# EAGLE board picfancontrol (EAGLE 9.5.2)

Size 100 x 80 mm. Coordinates in mm from the lower left corner, seen from the top.
Outline: 0,0 100,0 100,80 0,80 0,0
Copper layers 16: Bottom 0.035mm
Design rules "default": minimum track width 6mil, minimum drill 0.35mm, track to track 6mil, track to pad 6mil, pad to pad 6mil, via to via 6mil, smd to smd 6mil, copper to edge 40mil, drill to drill 6mil, minimum pad ring 10mil, minimum via ring 8mil, stop-mask expansion 4mil, vias tented up to drill 0mil, thermal gap 10mil

## Footprints (pad centres in the part's own frame; a part is rotated, then mirrored left to right if it is on the bottom)
1X02 = drill 1.016 long: 1 -1.27,0; 2 1.27,0
C2.5-2 = drill 0.813 pad 1.6 octagon: 1 -1.27,0; 2 1.27,0
DIL8 = drill 0.813 long: 1 -3.81,-3.81; 2 -1.27,-3.81; 3 1.27,-3.81; 4 3.81,-3.81; 5 3.81,3.81; 6 1.27,3.81; 7 -1.27,3.81; 8 -3.81,3.81
TO92 = drill 0.813 octagon: 1 -1.27,0; 2 0,1.905; 3 1.27,0
DPAK_TO252 = smd 3 x 1.6: 1 -4.2,2.28; 3 -4.2,-2.28 | smd 6 x 6.7: 2 2.5,0
RS-2,5 = drill 0.813 pad 1.6 octagon: 1 -1.27,0; 2 1.27,0

## Placement (x,y rotation side)
12V  [1X02]  5.08,77.47 0 top
C1  [C2.5-2]  63.5,67.31 0 top
FAN  [1X02]  3.81,60.96 270 top
IC1  PIC12F675P  [DIL8]  31.75,63.5 270 top
IC2  7805L  [TO92]  13.97,63.5 270 top
T1  [DPAK_TO252]  7.62,53.34 0 bottom
TR1  [RS-2,5]  52.07,40.64 0 top
TR2  [RS-2,5]  55.88,54.61 0 top

## Library data of the parts
12V FAN = pinhead
C1 = capacitor-wima
IC1 = microchip; MF: MICROCHIP; MPN: PIC12F675-E/P; OC_FARNELL: 9759018; OC_NEWARK: 92C4340
IC2 = linear
T1 = we-transistor
TR1 TR2 = discrete

## Nets
GND: 12V.2 C1.2 IC1.8 IC2.2 T1.3
N$1: C1.1 IC1.1 IC2.1 TR1.1 TR2.1
N$2: IC1.2
N$3: FAN.2 T1.2
N$4: T1.1
N$5: IC1.5 TR1.2
N$6: IC1.6 TR2.2
VDD: 12V.1 FAN.1 IC2.3

## Tracks (layer width: path | path; a pad name or v marks a point on that pad's centre or on a via)
GND  (4 unrouted)
N$1  (4 unrouted)
N$3  (1 unrouted)
N$5  (1 unrouted)
N$6  (1 unrouted)
VDD  (2 unrouted)